# Altium PCB HornRelay.PcbDoc
Units mil, origin at the board's own origin, x right, y up, seen from the top; angles counter-clockwise.
Board outline 2075 x 1355 mil, 2 copper layers (Top Layer, Bottom Layer); 12 components, 6 nets, 34 pads, 4 vias.
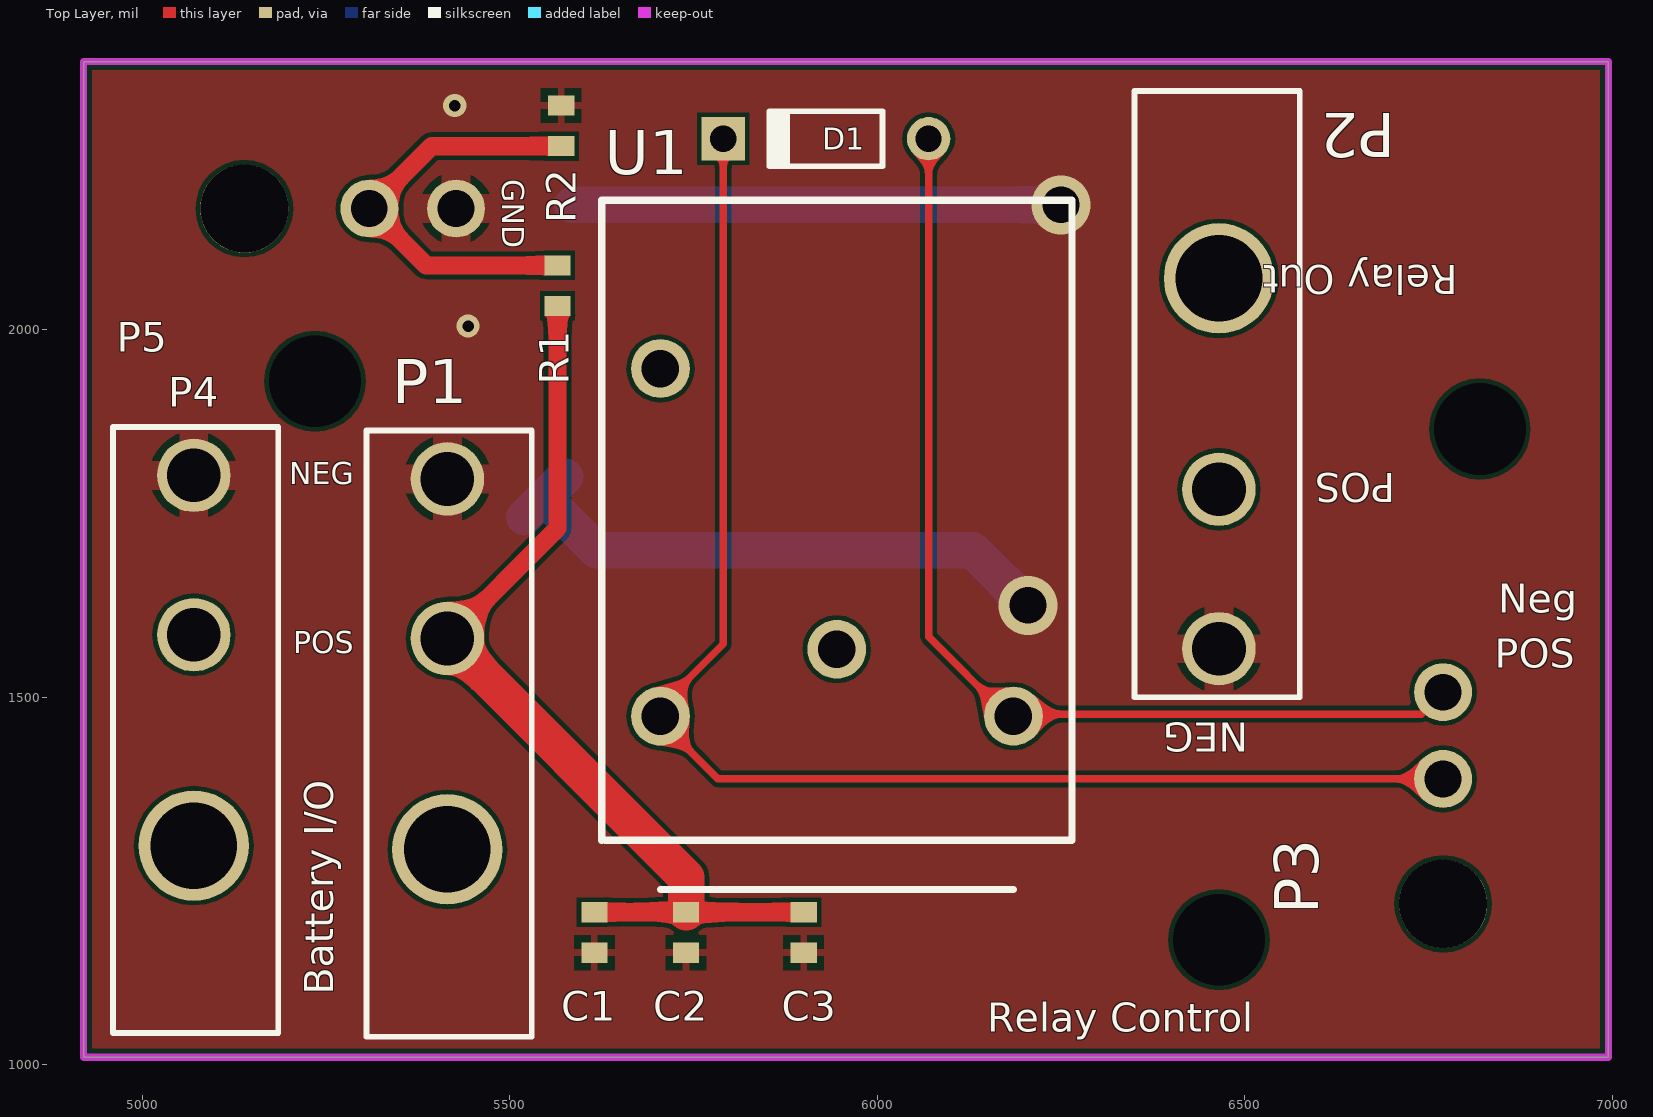
[diagram p0: Top Layer view]
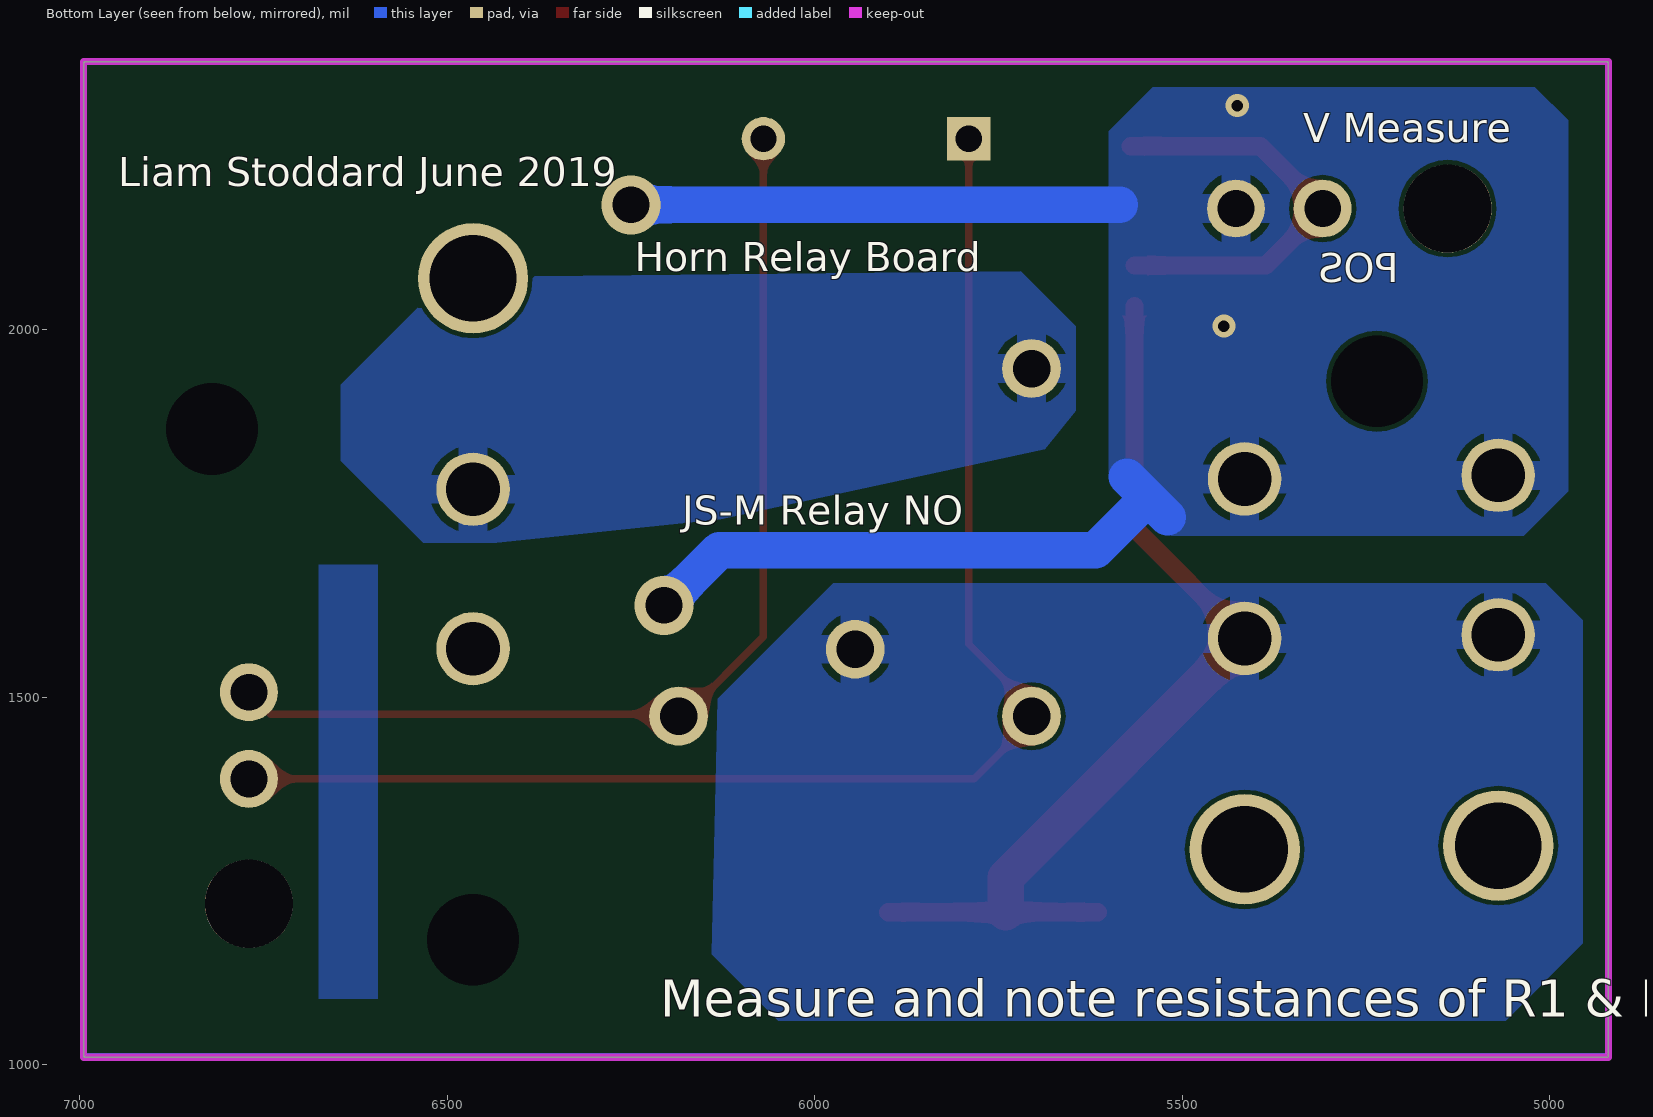
[diagram p1: Bottom Layer view, seen from below]
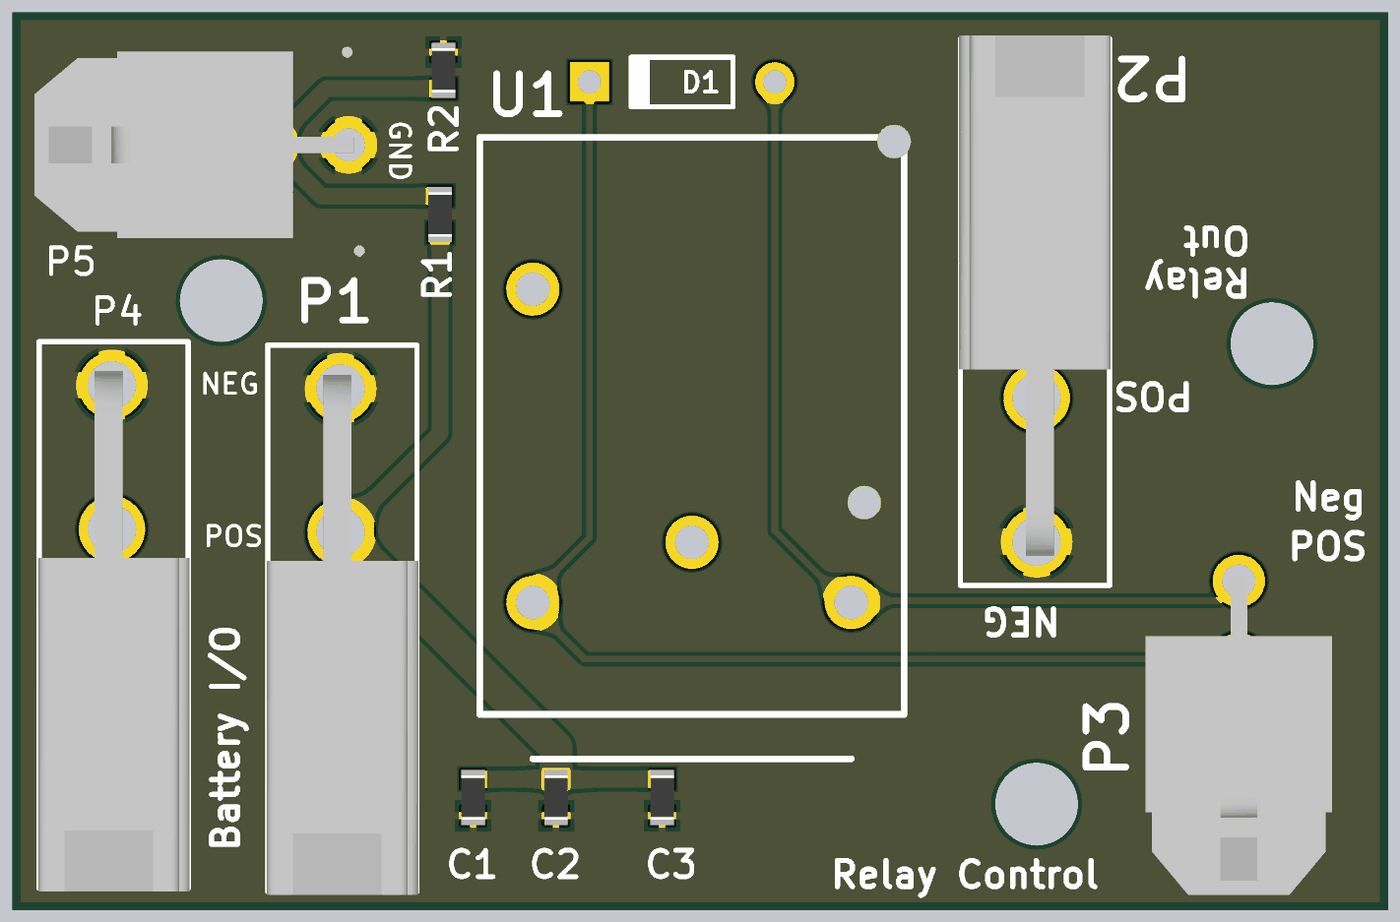
[diagram p2: 3D render of the assembled board from above, using the file's embedded part models]

## Layer stack, top to bottom
Top Solder: solder mask 0.4, Solder Resist, Dk 3.5
Top Layer: signal copper 1.4
Dielectric 1: dielectric 12.6, FR-4, Dk 4.8
Bottom Layer: signal copper 1.4
Bottom Solder: solder mask 0.4, Solder Resist, Dk 3.5

## Board outline
4920,1010 6995,1010 6995,2365 4920,2365

## Design rules (kind name [scope] priority, off if disabled: settings)
BoardOutlineClearance [All] p1: gap=11.81 ignorepadtopadclearanceinfootprint=FALSE
Clearance [All] p1: gap=6 ignorepadtopadclearanceinfootprint=FALSE except(0: Arc-Hole Track-Hole SMDPad-Hole THPad-Hole Via-Hole Fill-Hole Poly-Hole Region-Hole Text-Hole)
ComponentClearance [All] p1: gap=3.94 collisioncheckmode=3 verticalgap=10 showdistances=FALSE
FabricationTestPointUsage TestPointUsage [All] p1: valid=0 allowmultiple=FALSE
FabricationTestpoint Testpoint [All] p1: side=3 testpointundercomponent=TRUE minsize=40 maxsize=100 preferedsize=60 minholesize=0 maxholesize=40 preferedholesize=32 testpointgrid=1 allowsidetop=TRUE allowsidebottom=TRUE usegrid=TRUE gridtolerance=0.01
HoleSize [All] p1: absolutevalues=TRUE maxlimit=248.03 minlimit=11.81 maxpercent=80.000 minpercent=20.000
HoleToHoleClearance [All] p1: gap=17.72 allowstackedmicrovias=TRUE
MinimumAnnularRing [All] p1: minimumring=5.91
MinimumSolderMaskSliver [All] p1: minsoldermaskwidth=2.95
PlaneClearance [All] p1: clearance=19.68
PlaneConnect [All] p1: planeconnectstyle=Direct reliefexpansion=20 reliefentries=4 reliefconductorwidth=10 reliefairgap=10
PolygonConnect "GND Via" [isVia AND InNet('GND')] p1: connectstyle=Direct reliefconductorwidth=10 reliefentries=4 polygonreliefangle="90 Angle" airgapwidth=10 // GND Via Connection
PolygonConnect [All] p2: thpad.connectstyle=Relief thpad.reliefconductorwidth=40 thpad.reliefentries=4 thpad.polygonreliefangle="90 Angle" thpad.airgapwidth=9.84 smdpad.connectstyle=Relief smdpad.reliefconductorwidth=10 smdpad.reliefentries=4 smdpad.polygonreliefangle="90 Angle" smdpad.airgapwidth=9.84 via.connectstyle=Relief via.reliefconductorwidth=10 via.reliefentries=4 via.polygonreliefangle="90 Angle" via.airgapwidth=9.84
RoutingVias [All] p1: holewidth=11.81 width=23.62 viastyle="Through Hole" minholewidth=11.81 minwidth=23.62 maxholewidth=248.03 maxwidth=259.84
SilkToSilkClearance [All] p1: silktosilkclearance=5.91
SilkToSolderMaskClearance SilkscreenOverComponentPads [IsPad] p1: minsilkscreentomaskgap=9.84 clearancetoexposedcopper=TRUE
SolderMaskExpansion [All] p1: expansion=3.94
Width [All] p1: maxlimit=78.74 minlimit=6 preferedwidth=9.84 minimp=50.000000 maximp=50.000000 favimp=50.000000
20 further rules are at their usual default settings.

## Components (designator, comment, footprint, x,y, rotation, side; value= is the part's Value field where it differs from the comment)
C1 "SCH_GENERIC_CAPACITOR_0603" PCB_GENERIC_SMD_0603 5615,1180 r90 top
C2 "SCH_GENERIC_CAPACITOR_0603" PCB_GENERIC_SMD_0603 5740,1180 r270 top
C3 "SCH_GENERIC_CAPACITOR_0603" PCB_GENERIC_SMD_0603 5900,1180 r90 top
D1 "Diode 1N914" DO-35 5930.24,2260 r180 top
P1 "Molex Mini-Fit 1x2" "Molex Mini-Fit Jr 2x1" 5415,1293 r0 top
P2 "Molex Mini-Fit 1x2" "Molex Mini-Fit Jr 2x1" 6465,2070 r180 top
P3 "SCH_MLX_1X2" PCB_MLX_MICROFIT_1X2 6770,1290 r0 top
P4 "Molex Mini-Fit 1x2" "Molex Mini-Fit Jr 2x1" 5070,1298 r0 top
P5 "SCH_MLX_1X2" PCB_MLX_MICROFIT_1X2 5210,2165 r270 top
R1 "47k" PCB_GENERIC_SMD_0603 5565,2060 r270 top
R2 "10k" PCB_GENERIC_SMD_0603 5570,2277.56 r270 top
U1 "JSM1A-12V-5 15A" "JSM1A-12V-5 15A" 5705,1947.27 r0 top

## Footprints (in the part's own frame and the unit in brackets; to place one, negate y for a bottom-side part, rotate by r counter-clockwise, add the part's x,y. Pads: shape width x height; smd on the part's side, far side on the other; paste and mask are expansions set on the pad)
DO-35 [mm] "Diode, Axial; Body 3.8 x 1.9 mm (LxDia. max), Lead Dia. 0.53 mm (max)"
  round 1.5 hole 0.9: 1(-3.55,0)
  rect 1.5x1.5 hole 0.9: 2(3.55,0)
  silkscreen extent -1.95,-0.95 2.05,0.95
"JSM1A-12V-5 15A" [mil]
  round 80 hole 51: 1(0,0) 2(0,-473) 3(480.31,-473) 5(240,-382)
  silkscreen extent -80,-709 560,229, body extent -75,-642 555,224, height 10
"Molex Mini-Fit Jr 2x1" [mil]
  round 100 hole 73: 1(0,287) 2(0,504)
  round 150 hole 118: ""(0,0)
  silkscreen extent -110,-255 115,570, body extent -111,-260 117,525, height 449
PCB_GENERIC_SMD_0603 [mm]
  rect 0.7x0.9 smd: 1(-0.7,0) 2(0.7,0)
  body extent -0.85,-0.45 0.85,0.45, height 0.55
PCB_MLX_MICROFIT_1X2 [mm]
  round 2 hole 1.27: 1(0,2.511) 2(0,5.508)
  round 3.048 hole 3.048 unplated: ""(0,-1.807)
  body extent -3.58,-6.52 3.58,5.72, height 8.77

## Part data
C1 C2 C3: "Generic SMD capacitor 0603", Capacitance=*F, Tolerance=*%, Voltage=*V
D1: "High Conductance Fast Diode", Code_JEDEC=DO-204-AH, ComponentLink1Description="Manufacturer Link", ComponentLink1URL=http://www.fairchildsemi.com/, ComponentLink2Description=Datasheet, ComponentLink2URL=http://www.fairchildsemi.com/ds/1N%2F1N4448.pdf, DatasheetVersion=1997, LatestRevisionDate=17-Jul-2002, LatestRevisionNote="Re-released for DXP Platform.", PackageDescription="Diode, Axial; Body 3.8 x 1.9 mm (LxDia. max), Lead Dia. 0.53 mm (max)", PackageReference=DO-35, Published=8-Jun-2000, Publisher="Altium Limited"
R1 R2: library part SCH_GENERIC_RESISTOR_0603, "Generic SMD resistor 0603"
U1: "15A Relay 255-2815-ND"

## Free pads (board coordinates)
  round 0 hole 125 unplated paste+0: 3(5235,1930) 3(6465,1170) 3(6820,1865)

## Via types
v1: diameter 80, hole 50, Top Layer to Bottom Layer, tented both sides, 2 vias
v2: diameter 31.5, hole 15.75, Top Layer to Bottom Layer, tented both sides, 2 vias

## Nets (pads, with @x,y where several pads share a name; then routed paths per layer and width w, separated by ;. In a path a pad name is that pad's centre, name@x,y a point inside that pad or via, vN(x,y) a via of type N, cw(c..) or ccw(c..) an arc to the next point about the centre after c; other vN are vias at no path point)
Bat: C1.2 C2.1 C3.2 P1.1 P4.1 R1.2 U1.5 | length 1313.7
  Top Layer w25: P1.1 5565,1730 5565,1990 R1.2 ; C1.2 C2.1 C3.2
  Top Layer w50: P1.1 5740,1255 C2.1
  Bottom Layer w78.74: P1.1@5410,1585 P1.1
Bat_Voltage: P5.1 R1.1 R2.2 | length 584.6
  Top Layer w25: R1.1 5520,2087.56 5386.3,2087.56 P5.1 5393.86,2250 5515,2250 R2.2
GND: C1.1 C2.2 C3.1 P1.2 P2.2 P4.2 P5.2 R2.1 | length 1462
  Bottom Layer w50: 5520,1745 5546.5,1771.5 ; 5575,1800 5546.5,1771.5 ; 5585,2170 v1(6250,2170) ; v1(6205,1625) 6130,1700 5618,1700 5546.5,1771.5
  other v2: 5443.24,2005 5425,2305
Relay_Control_Neg: D1.1 P3.2 U1.3 | length 1433.7
  Top Layer w10: D1.1 6070,1582.32 6175.31,1477 6740.14,1477 P3.2
Relay_Control_Pos: D1.2 P3.1 U1.2 | length 1934.1
  Top Layer w10: D1.2 5790.47,1572.47 5695,1477 5783.14,1388.86 P3.1
Relay_Out: P2.1 U1.1
pads on no net: P1. P2. P3. P4. P5.

## Polygon pours and split planes (outlines as drawn)
GND on Bottom Layer (solid, pour order 17): 5020,2330 4975,2285 4975,1780 5035,1720 5515,1720 5600,1805 5600,2270 5540,2330
no net on Bottom Layer (solid, pour order 21): 6595,1680 6595,1090 6675,1090 6675,1680
no net on Bottom Layer (solid, pour order 13): 5520,1726.53
Bat on Bottom Layer "Bottom Layer-Bat" (solid, pour order 7): 6132.27,1497.73 5975,1655 5005,1655 4955,1605 4955,1165 5060,1060 6050,1060 6140,1150
Relay_Out on Bottom Layer "Bottom Layer-Relay_Out" (solid, pour order 9): 5720,2080 5645,2005 5645,1889.54 5687.11,1837.39 6127.76,1742.48 6432.85,1710 6533,1710 6645,1822 6645,1925 6498.75,2071.25
GND on Bottom Layer "BottomPour" (solid, remove dead copper, shelved, pour order 2): 4920,1015 6990,1015 6995,1010 6995,2365 4920,2365
GND on Top Layer "TopPour" (solid, remove dead copper, pour order 0): 4920,2365 4920,1020 6985,1020 6995,1010 6995,2365

## Keep-outs
Keep-Out Layer:
  the board outline again, w10

## Silkscreen, mask and mechanical layers (free items; w line width, h text height)
Top Overlay:
  text "GND" at 5490,2205 h30 r270
  text "Relay Out" at 6790,2087.56 h39.37 r180
  text "POS" at 6705,1805 h39.37 r180
  text "NEG" at 5200,1790 h30
  text "Neg" at 6845,1615 h39.37
  text "POS" at 5205,1560 h30
  text "POS" at 6840,1540 h39.37
  text "NEG" at 6505,1465 h39.37 r180
  text "Battery I/O" at 5260,1095 h39.37 r90
  text "Relay Control" at 6150,1045 h39.37
Bottom Overlay:
  text "V Measure" at 5335,2255 h39.37
  text "Liam Stoddard June 2019" at 6947.87,2195 h39.37
  text "Horn Relay Board" at 6245,2080 h39.37
  text "POS" at 5205,2065 h39.37
  text "JS-M Relay NO" at 6180,1735 h39.37
  text "Measure and note resistances of R1 & R2" at 6210,1065 h50
Bottom Solder:
  text "Colton's \"Horny Board\"" at 6645,1650 h25 r90